# EAGLE board SDR1806 (EAGLE 7.3.0)
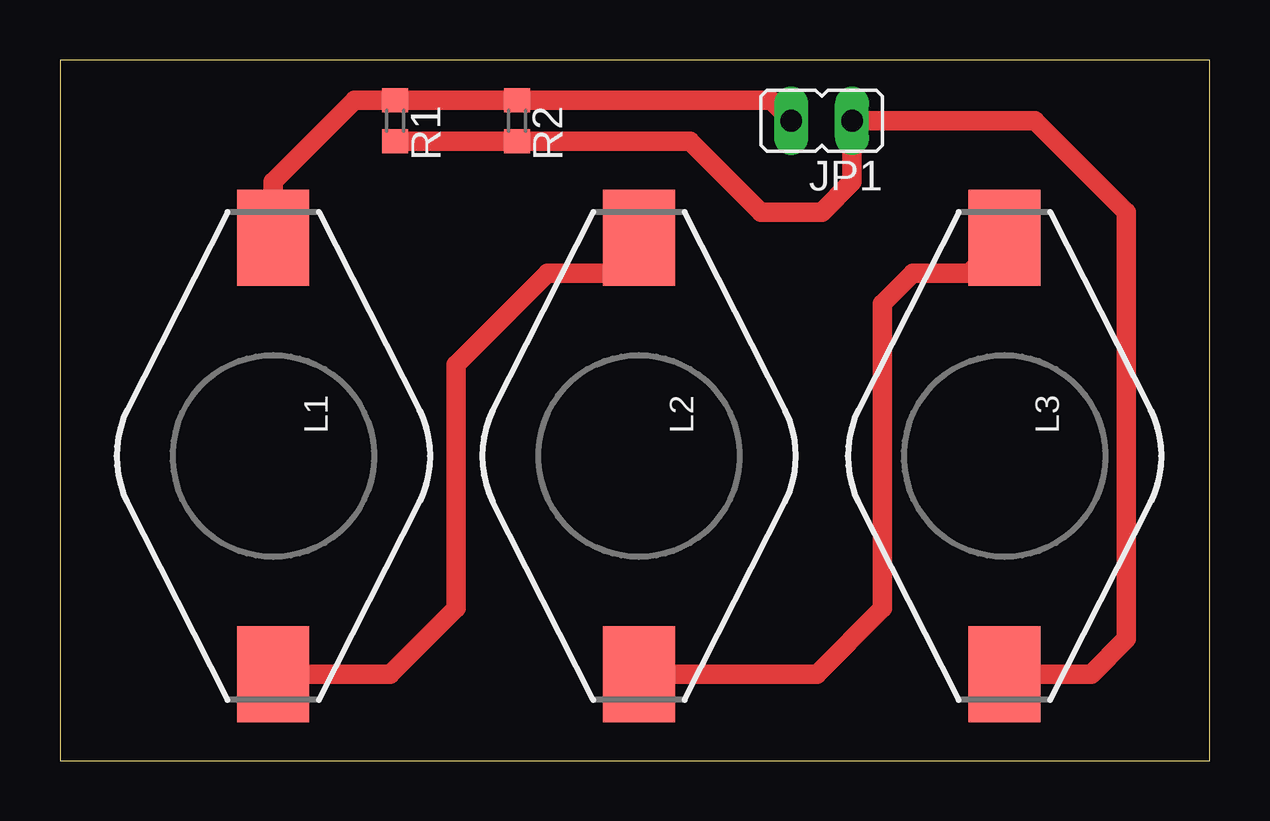
[diagram p0: board, top side]

Size 47.93 x 29.2 mm. Coordinates in mm from the lower left corner, seen from the top.
Outline: 0,0 47.93,0 47.93,29.2 0,29.2 0,0
Copper layers (1*16): Top 0.035mm / dielectric 1.5mm / Bottom 0.035mm
Design rules "default": minimum track width 10mil, minimum drill 24mil, track to track 8mil, track to pad 8mil, pad to pad 8mil, via to via 8mil, smd to smd 8mil, copper to edge 40mil, drill to drill 8mil, minimum pad ring 10mil, minimum via ring 8mil, stop-mask expansion 4mil, vias tented up to drill 0mil, thermal gap 10mil

## Footprints (pad centres in the part's own frame; a part is rotated, then mirrored left to right if it is on the bottom)
JP1 = drill 0.914 long: 1 0,-1.27; 2 0,1.27
SDR1806 = smd 4 x 3: 1 -9.09,0; 2 9.09,0
R0603 = smd 1 x 1.1: 1 -0.85,0; 2 0.85,0

## Placement (x,y rotation side)
JP1  [JP1]  31.75,26.67 90 top
L1  SDR1806  [SDR1806]  8.89,12.7 270 top
L2  SDR1806  [SDR1806]  24.13,12.7 270 top
L3  SDR1806  [SDR1806]  39.37,12.7 270 top
R1  [R0603]  13.97,26.67 270 top
R2  [R0603]  19.05,26.67 270 top

## Library data of the parts
JP1 = jumper
L1-L3 = SDR1806
R1 R2 = rcl

## Nets
N$1: L1.2 L2.1
N$2: L2.2 L3.1
N$3: JP1.2 L1.1 R1.1 R2.1
N$4: JP1.1 L3.2 R1.2 R2.2

## Tracks (layer width: path | path; a pad name or v marks a point on that pad's centre or on a via)
N$1
  Top 0.813: L1.2 13.77,3.61 16.51,6.35 16.51,16.51 20.32,20.32 22.86,20.32 24.13,21.59 L2.1
N$2
  Top 0.813: L2.2 31.55,3.61 34.29,6.35 34.29,19.05 35.56,20.32 37.9,20.32 L3.1
N$3
  Top 0.813: 8.89,21.59 L1.1 8.89,24.13 12.28,27.52 R1.1 R2.1 29.63,27.52 JP1.2
N$4
  Top 0.813: L3.2 42.98,3.61 44.45,5.08 44.45,22.86 40.64,26.67 JP1.1 33.02,24.13 31.75,22.86 29.21,22.86 26.25,25.82 R2.2 R1.2